# Altium PCB PCB1.PcbDoc
Units mm, origin at the board's own origin, x right, y up, seen from the top; angles counter-clockwise.
Board outline 61 x 61 mm, 2 copper layers (Top Layer, Bottom Layer); 24 components, 33 nets, 119 pads, 18 vias.
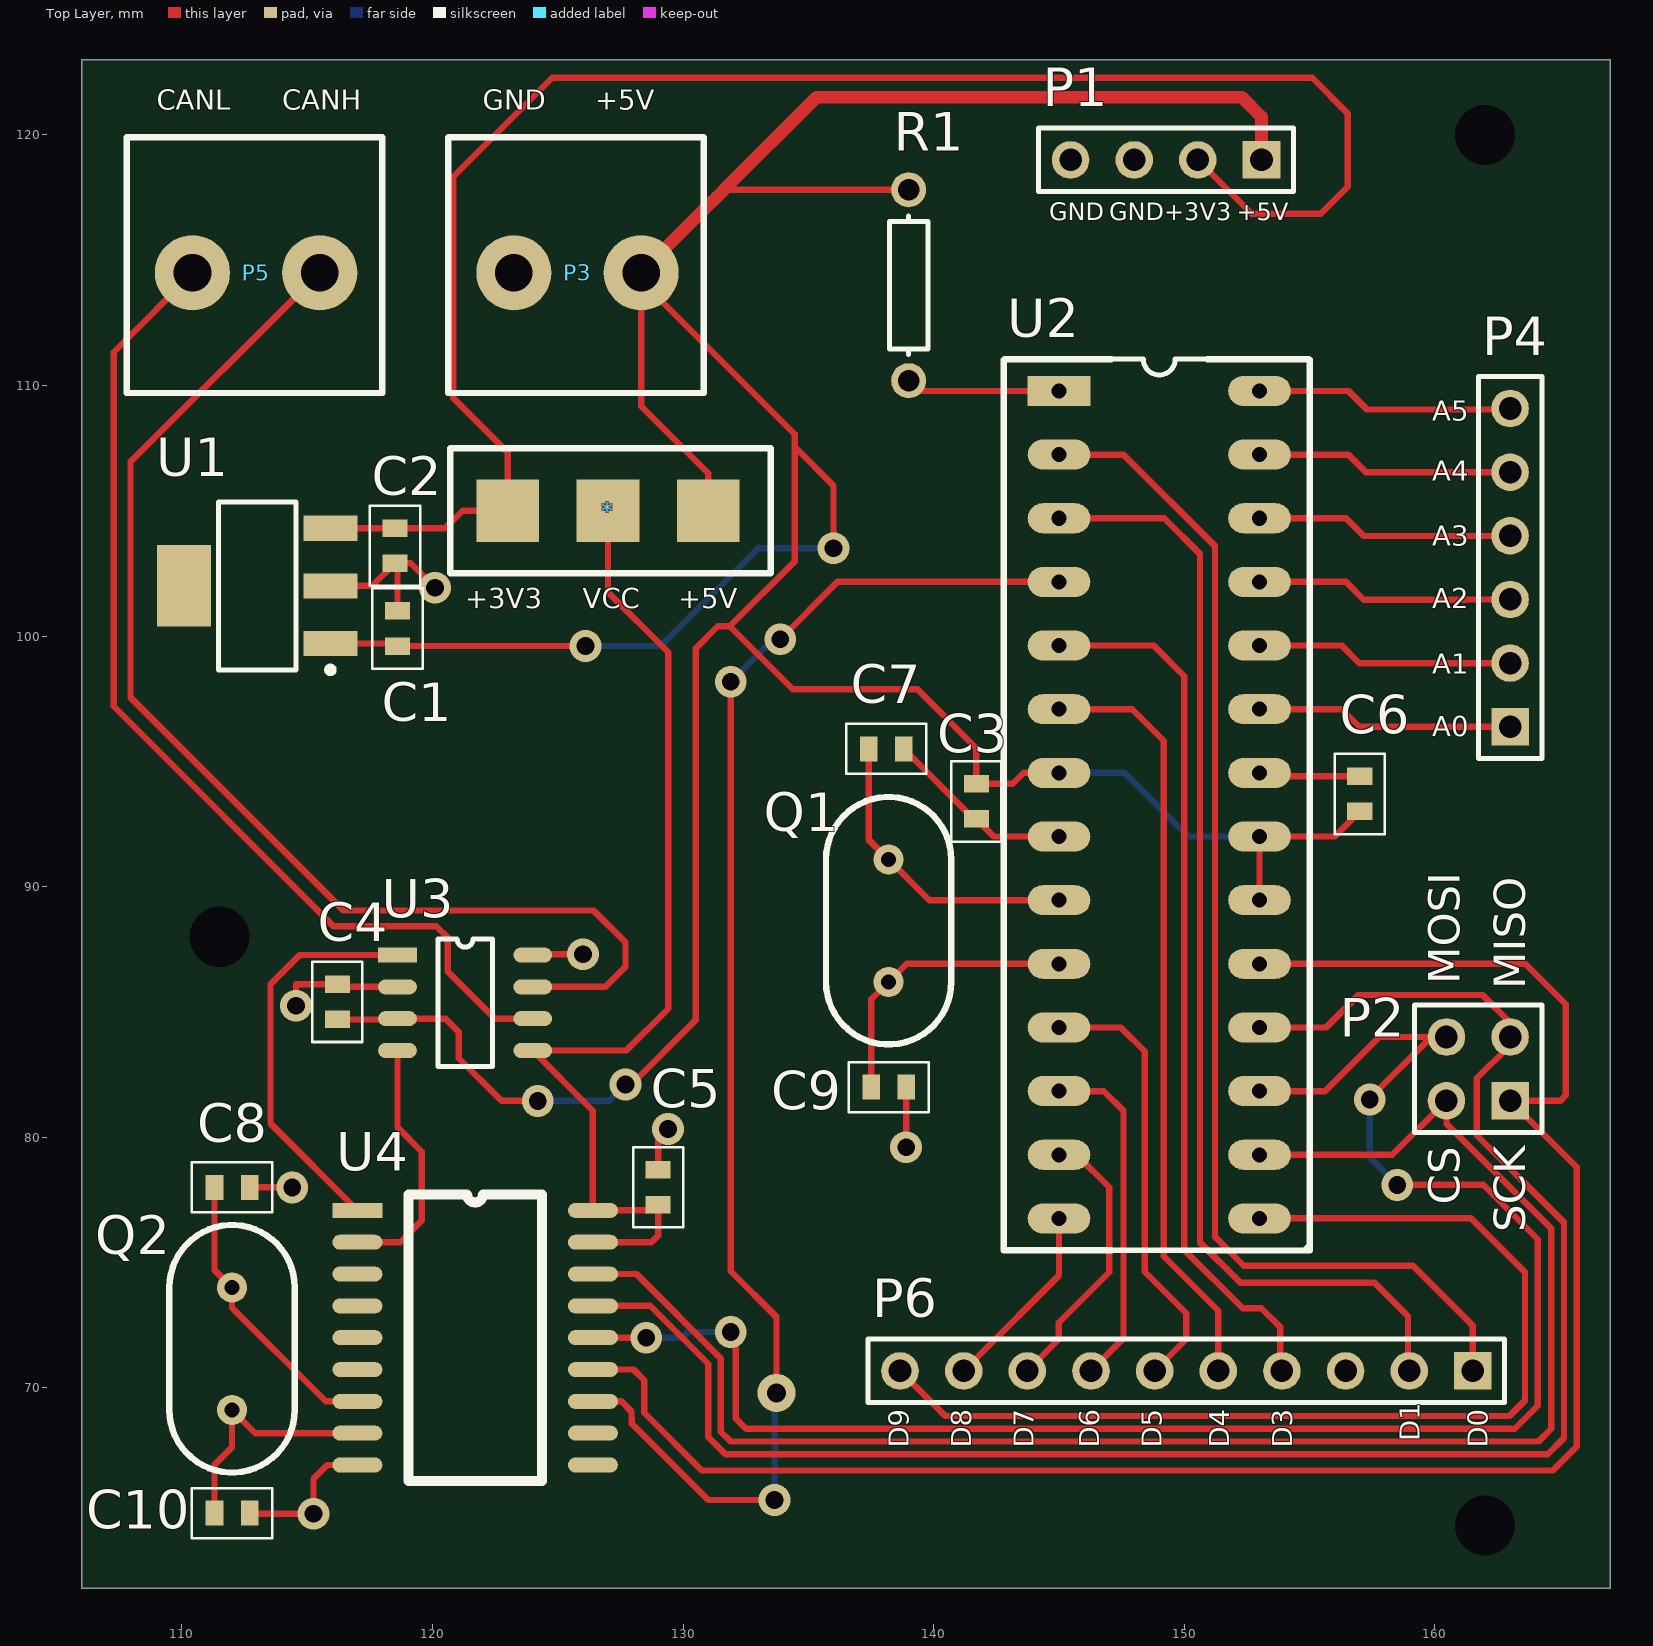
[diagram p0: Top Layer view]
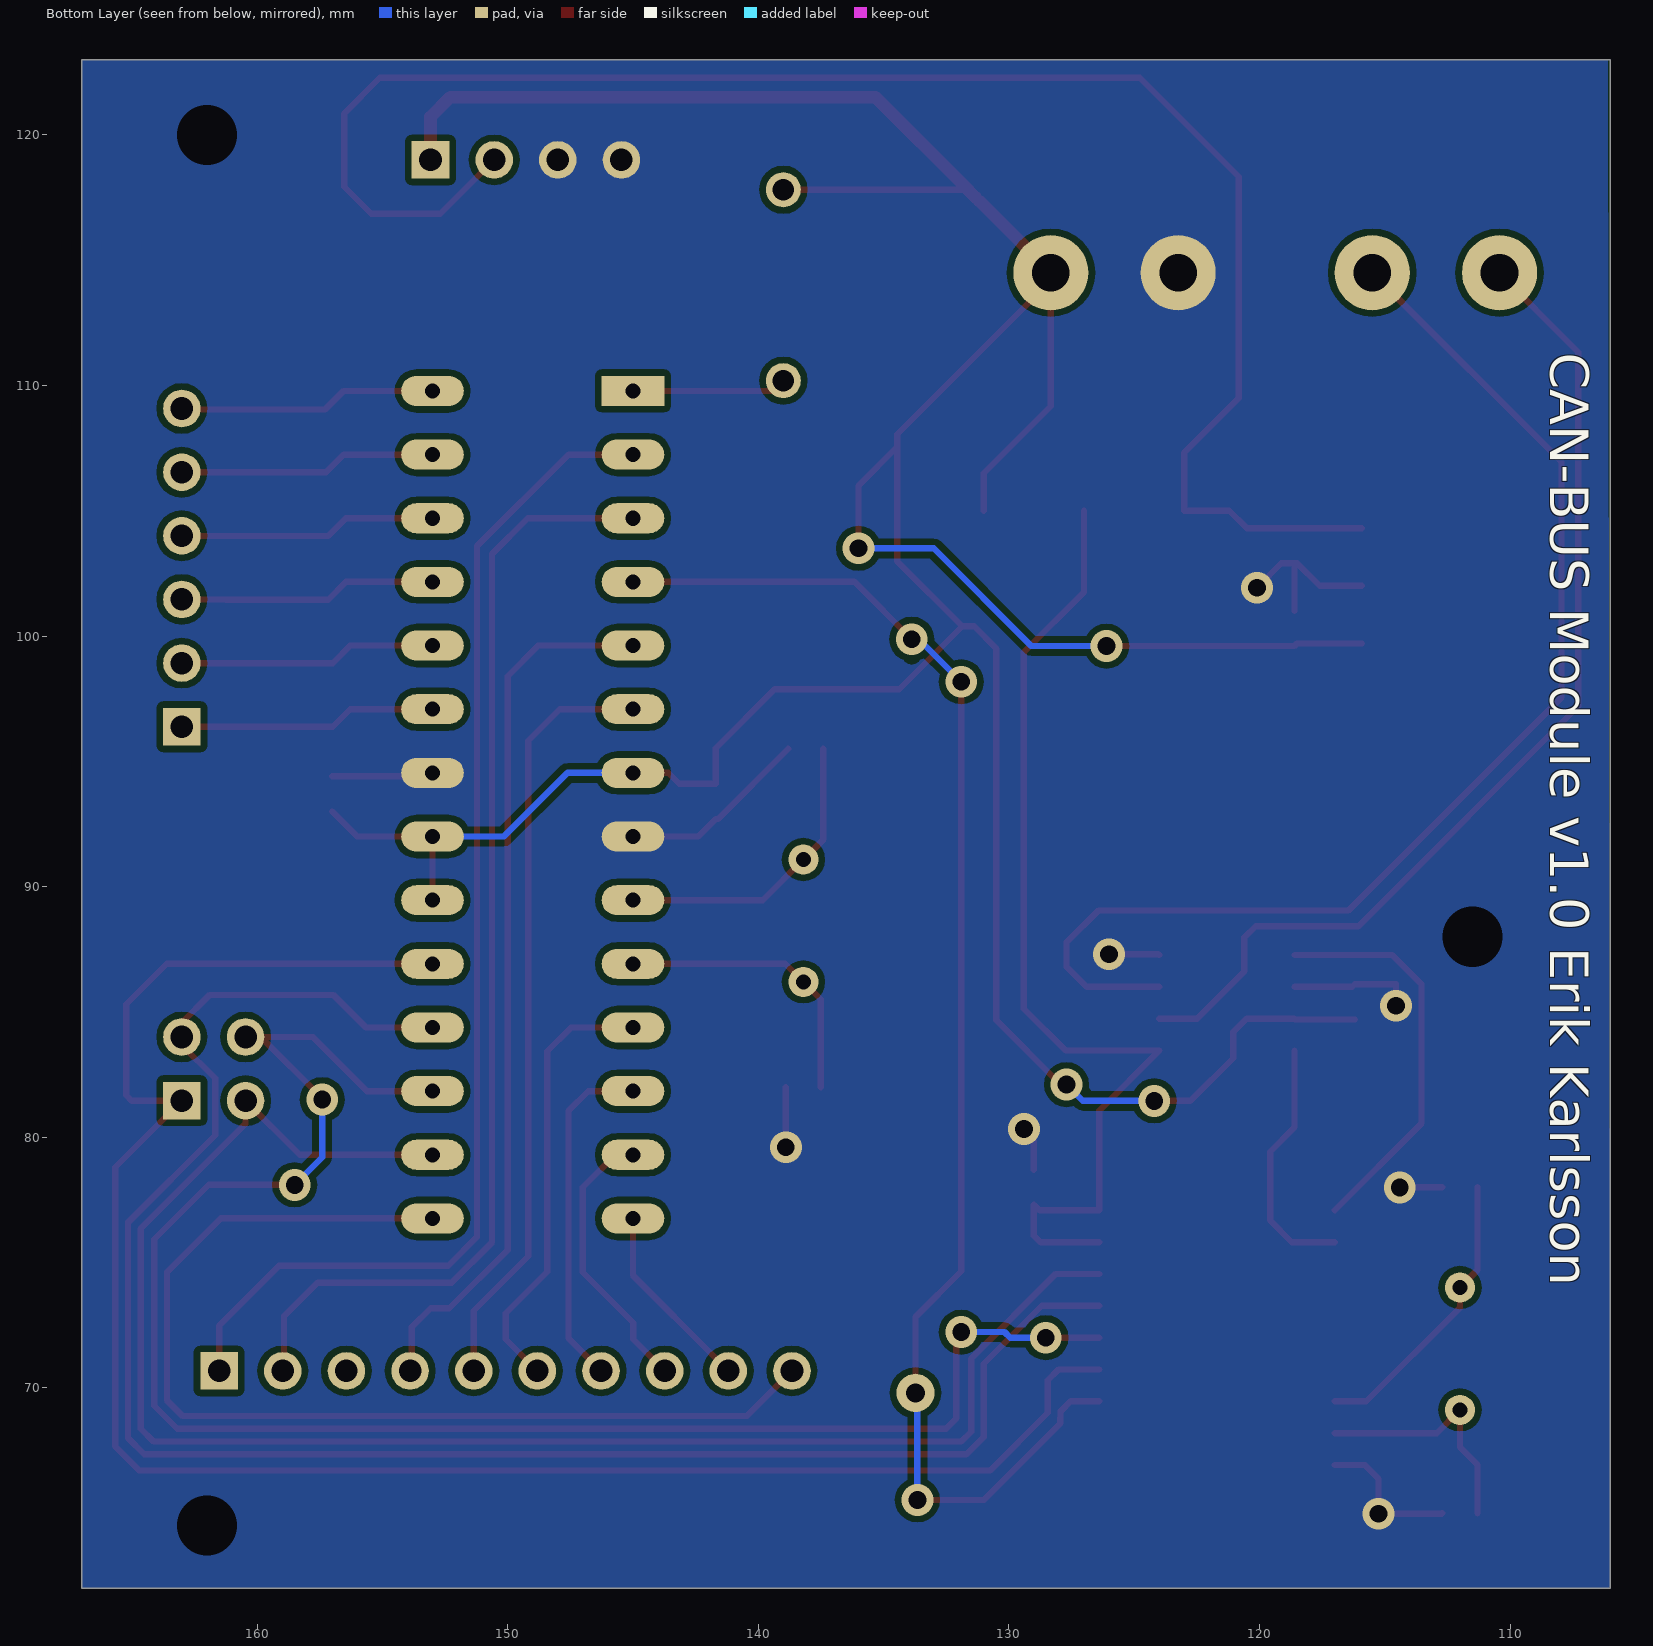
[diagram p1: Bottom Layer view, seen from below]
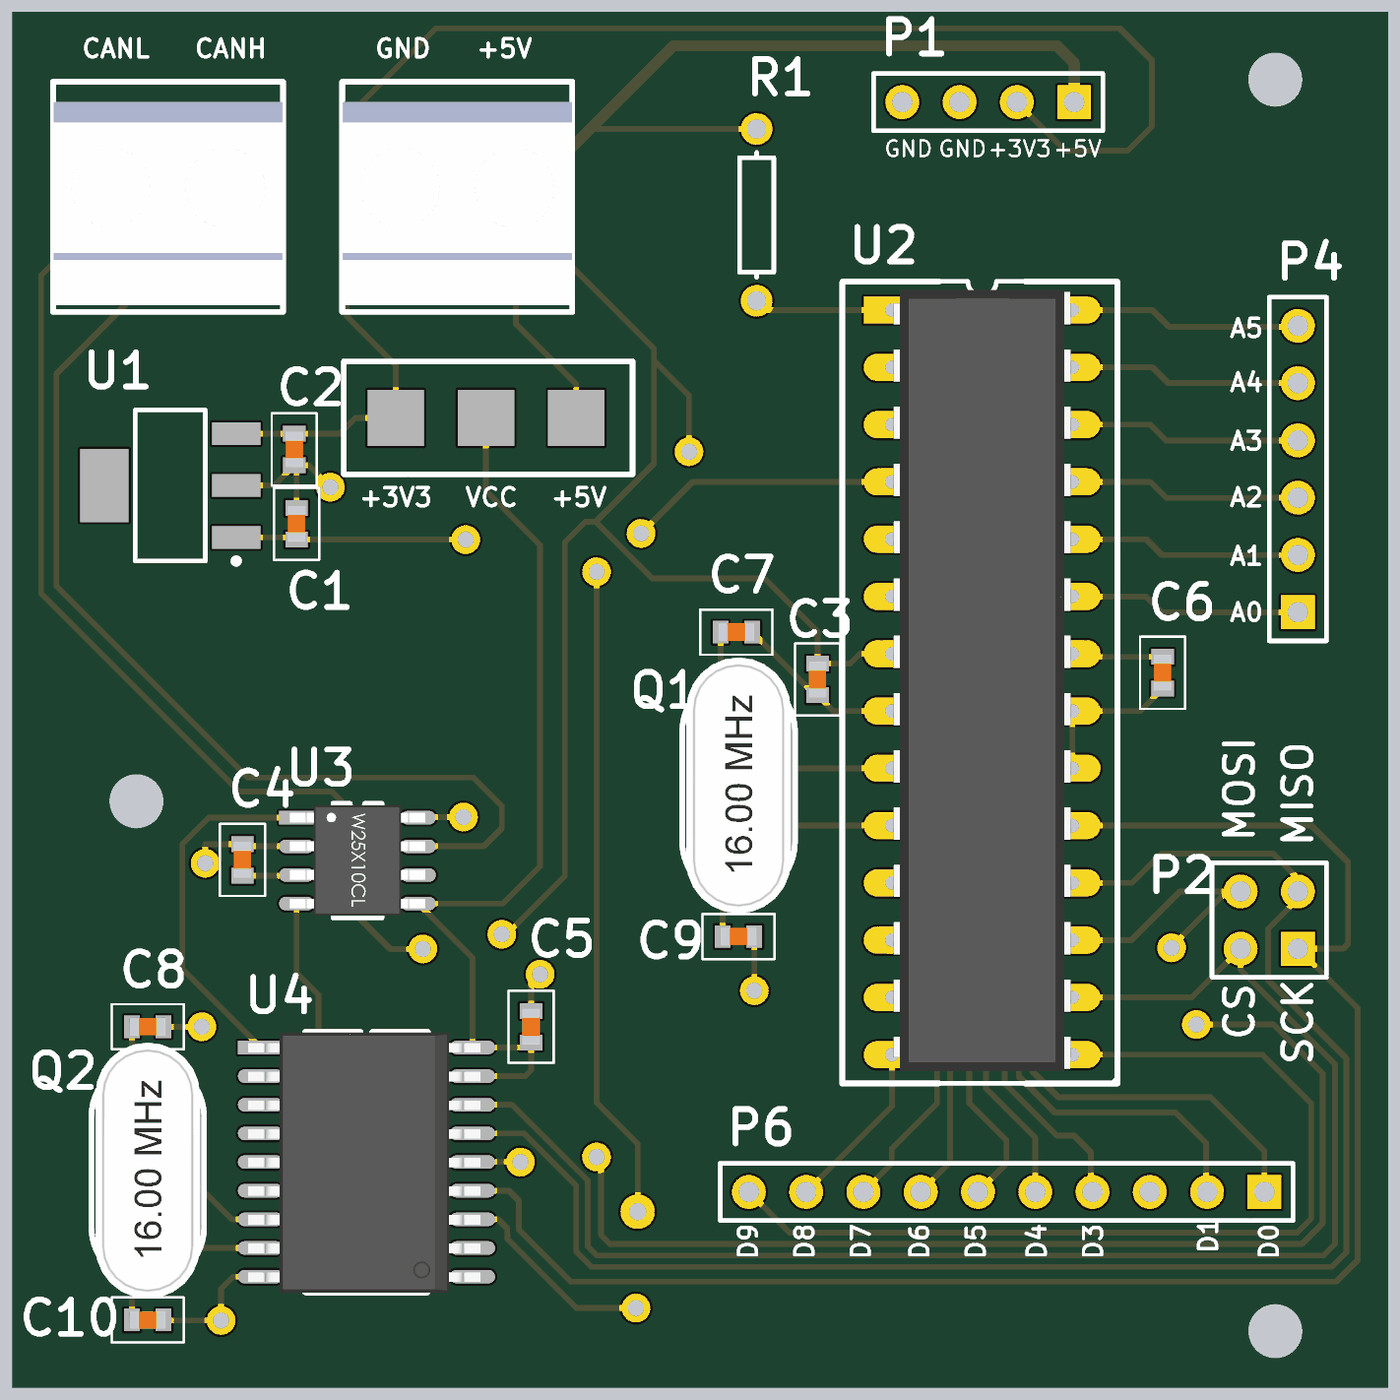
[diagram p2: 3D render of the assembled board from above, using the file's embedded part models]

## Layer stack, top to bottom
Top Solder: solder mask 0.0102, Solder Resist, Dk 3.5
Top Layer: signal copper 0.0356
Dielectric 1: dielectric 0.32, FR-4, Dk 4.8
Bottom Layer: signal copper 0.0356
Bottom Solder: solder mask 0.0102, Solder Resist, Dk 3.5

## Board outline
106,123 106,62 167,62 167,123

## Design rules (kind name [scope] priority, off if disabled: settings)
Clearance [All] p1: gap=0.254 ignorepadtopadclearanceinfootprint=FALSE except(0: Arc-Hole Track-Hole SMDPad-Hole THPad-Hole Via-Hole Fill-Hole Poly-Hole Region-Hole Text-Hole)
PolygonConnect [All] p1: connectstyle=Direct reliefconductorwidth=0.254 reliefentries=4 polygonreliefangle="90 Angle" airgapwidth=0.254
RoomDefinition Sheet1 [InComponentClass('Sheet1')] p1: confinementstyle=ConfineOut formatcopy=TRUE lockcomponents=FALSE outline 212.2,59.2 219.8,59.2 219.8,127.7 212.2,127.7
RoutingVias [All] p1: holewidth=0.711 width=1.27 viastyle="Through Hole" minholewidth=0.711 minwidth=1.27 maxholewidth=0.711 maxwidth=1.27
SolderMaskExpansion [All] p1: expansion=0.102
Width [All] p1: maxlimit=0.5 minlimit=0.254 preferedwidth=0.254 bottomlayer_maxwidth=0.254 minimp=50.000000 maximp=50.000000 favimp=50.000000
30 further rules are at their usual default settings.

## Components (designator, comment, footprint, x,y, rotation, side; value= is the part's Value field where it differs from the comment)
* "solderpads" solderpads 127,105 r180 top
C1 "Cap" "0603 cap" 118.6,100.3 r270 top value=1uF
C2 "Cap" "0603 cap" 118.5,103.6 r90 top value=1uF
C3 "Cap" "0603 cap" 141.7,93.4 r90 top value=0.1uF
C4 "Cap" "0603 cap" 116.2,85.4 r270 top value=0.1uF
C5 "Cap" "0603 cap" 129,78 r270 top value=0.1uF
C6 "Cap" "0603 cap" 157,93.7 r270 top value=0.1uF
C7 "Cap" "0603 cap" 138.1,95.5 r180 top value=22pF
C8 "Cap" "0603 cap" 112,78 r180 top value=22pF
C9 "Cap" "0603 cap" 138.2,82 r180 top value=22pF
C10 "Cap" "0603 cap" 112,65 r180 top value=22pF
P1 "Header 4" HDR1X4 153.08,119 r180 top
P2 "Header 2X2" HDR2X2 163,81.46 r90 top
P3 "MC24366" "2pin screw terminal" 128.325,114.5 r180 top
P4 "Header 6" HDR1X6 163,96.38 r90 top
P5 "MC24366" "2pin screw terminal" 115.5,114.5 r180 top
P6 "Header 10" HDR1X10 161.515,70.675 r180 top
Q1 "16mhz" "DIP HC-49S" 138.2,86.2 r90 top
Q2 "16mhz" "DIP HC-49S" 112,69.12 r90 top
R1 "Res1" AXIAL-0.3 139,114 r90 top value=10K
U1 "TC1262-3.3VDB" SOT230P700X180-4N 113,102 r180 top
U2 "ATMEGA328P-PU" DIP28 145,109.78 r0 top
U3 "MCP2562-E/SN" SOIC8 118.6,87.27 r0 top
U4 "MCP2515-I/SO" SOIC18 117,77.08 r0 top

## Footprints (in the part's own frame and the unit in brackets; to place one, negate y for a bottom-side part, rotate by r counter-clockwise, add the part's x,y. Pads: shape width x height; smd on the part's side, far side on the other; paste and mask are expansions set on the pad)
"2pin screw terminal" [mm]
  round 3 hole 1.5: 1(0,0) 2(5.08,0)
  silkscreen extent -2.5,-5.4 7.7,4.8, body extent -2.48,-4.5 7.68,4.5, height 15.2
"0603 cap" [mm]
  rect 0.7x1 smd: 1(-0.7,0) 2(0.7,0)
  silkscreen extent -1.6,-1 1.6,1, body extent -0.8,-0.4 0.8,0.4, height 0.5
AXIAL-0.3 [mm] "Axial Device, Thru-Hole; 2 Leads; 0.3 in Pin Spacing"
  round 1.4 hole 0.85: 1(-3.81,0) 2(3.81,0)
  silkscreen extent -2.77,-0.76 2.77,0.76
DIP28 [mm]
  rect 2.5x1.2 hole 0.6: 1(0,0)
  oval 2.5x1.2 hole 0.6: 2(0,-2.54) 3(0,-5.08) 4(0,-7.62) 5(0,-10.16) 6(0,-12.7) 7(0,-15.24) 8(0,-17.78) 9(0,-20.32) 10(0,-22.86) 11(0,-25.4) 12(0,-27.94) 13(0,-30.48) 14(0,-33.02) 15(8,-33.02) 16(8,-30.48) 17(8,-27.94) 18(8,-25.4) 19(8,-22.86) 20(8,-20.32) 21(8,-17.78) 22(8,-15.24) 23(8,-12.7) 24(8,-10.16) 25(8,-7.62) 26(8,-5.08) 27(8,-2.54) 28(8,0)
  silkscreen extent -2.2,-34.3 10,1.27, body extent 0.05,-33.75 7.95,0.9, height 5.44
"DIP HC-49S" [mm] "XTAL 16mhz"
  round 1.2 hole 0.6: 1(0,0) 2(4.88,0)
  silkscreen extent -2.5,-2.5 7.38,2.5, body extent -3.17,-2.32 8.18,2.33, height 3.6
HDR1X4 [mm] "Connector; Header; 4 Position"
  rect 1.5x1.5 hole 0.9: 1(0,0)
  round 1.5 hole 0.9: 2(2.54,0) 3(5.08,0) 4(7.62,0)
  silkscreen extent -1.27,-1.27 8.89,1.27
HDR1X6 [mm] "Connector; Header; 6 Position"
  rect 1.5x1.5 hole 0.9: 1(0,0)
  round 1.5 hole 0.9: 2(2.54,0) 3(5.08,0) 4(7.62,0) 5(10.16,0) 6(12.7,0)
  silkscreen extent -1.27,-1.27 13.97,1.27
HDR1X10 [mm] "Connector; Header; 10 Position"
  rect 1.5x1.5 hole 0.9: 1(0,0)
  round 1.5 hole 0.9: 2(2.54,0) 3(5.08,0) 4(7.62,0) 5(10.16,0) 6(12.7,0) 7(15.24,0) 8(17.78,0) 9(20.32,0) 10(22.86,0)
  silkscreen extent -1.27,-1.27 24.13,1.27
HDR2X2 [mm] "Connector; Header; 2x2 Position"
  rect 1.5x1.5 hole 0.9: 1(0,0)
  round 1.5 hole 0.9: 2(0,2.54) 3(2.54,0) 4(2.54,2.54)
  silkscreen extent -1.27,-1.27 3.81,3.81
SOIC8 [mm] "MCP2562-E/SO"
  rect 1.55x0.6 smd: 1(0,0)
  oval 1.55x0.6 smd: 2(0,-1.27) 3(0,-2.54) 4(0,-3.81) 5(5.4,-3.81) 6(5.4,-2.54) 7(5.4,-1.27) 8(5.4,0)
  silkscreen extent 1.61,-4.44 3.79,0.64, body extent -0.3,-4.35 5.7,0.55, height 1.55
SOIC18 [mm] "MCP2515-I/SO"
  rect 2x0.6 smd: 1(0,0)
  oval 2x0.6 smd: 2(0,-1.27) 3(0,-2.54) 4(0,-3.81) 5(0,-5.08) 6(0,-6.35) 7(0,-7.62) 8(0,-8.89) 9(0,-10.16) 10(9.4,-10.16) 11(9.4,-8.89) 12(9.4,-7.62) 13(9.4,-6.35) 14(9.4,-5.08) 15(9.4,-3.81) 16(9.4,-2.54) 17(9.4,-1.27) 18(9.4,0)
  silkscreen extent 2.03,-10.79 7.36,0.64, body extent -0.55,-10.86 9.75,0.67, height 2.65
solderpads [mm]
  rect 2.5x2.5 smd: 1(-4,0) 2(4,0) 3(0,0)
  silkscreen extent -6.5,-2.5 6.3,2.5
SOT230P700X180-4N [mm] "SOT223, 4-Leads, Body 6,50x7,00mm (avg), Pitch 2,30mm, IPC Medium Density"
  rect 2.15x1 smd: 1(-2.925,2.3) 2(-2.925,0) 3(-2.925,-2.3)
  rect 2.15x3.25 smd: 4(2.925,0)
  silkscreen extent -3.05,-3.35 1.55,3.47, body extent -1.85,-3.35 1.85,3.35, height 1.8

## Part data
C1 C2 C3 C4 C5 C6 C7 C8 C9 C10: "Capacitor", Capacitance="100000 pF", Case Style="Ceramic Chip", Manufacturer="Walsin Technologies", Manufacturer Part Number=0603B104K500CT, Operating Temp Range="-55C to 125C", Package / Case=0603, Supplier Part Number 1=2495333, Temp Coeff (Dielectric)=X7R, Tolerance (+ or -)=10%, Voltage=50VDC, ComponentLink1Description=https://www.verical.com/server-webapp/html/getDatasheet?partID=415741, ComponentLink1URL=https://www.verical.com/server-webapp/html/getDatasheet?partID=415741, ComponentLink2Description=http://www.farnell.com/datasheets/1958513.pdf, ComponentLink2URL=http://www.farnell.com/datasheets/1958513.pdf, ComponentLink3Description=http://components.arrow.com/part/dataview/0323_00656447, ComponentLink3URL=http://components.arrow.com/part/dataview/0323_00656447, Construction="SMT Chip", Failure Rate="Not Required", LatestRevisionDate=17-Jul-2002, LatestRevisionNote="Re-released for DXP Platform.", Mounting Style="Surface Mount", PackageDescription="Radial Cap, Thru-Hole; 2 Leads; 0.3 in Pin Spacing", PackageReference=RAD-0.3, Packaging="Tape and Reel", Pricing 1="4000=0.0042, 20000=0.0028, 40000=0.0022 (EUR)", Product Depth (mm)="0.8 mm", Product Diameter (mm)="Not Required mm", Product Height (mm)="0.8 mm", Product Length (mm)="1.6 mm", Published=8-Jun-2000, Publisher="Altium Limited", Rad Hardened=No, Stock 1=3233000, Supplier 1=Farnell, Wire Form="Not Required"
P1: "Header, 4-Pin", LatestRevisionDate=17-Jul-2002, LatestRevisionNote="Re-released for DXP Platform.", Publisher="Altium Limited"
P2: "Header, 2-Pin, Dual row", LatestRevisionDate=17-Jul-2002, LatestRevisionNote="Re-released for DXP Platform.", Publisher="Altium Limited"
P3 P5: "TERMINAL BLOCK EUROSTYLE, 2POS, 26-12AWG", Manufacturer=Multicomp, Rated Current=16A, Rated Voltage=300V, Supplier Part Number 1=2396251, Block Orientation="Through Hole Right Angle", ComponentLink1Description=https://datasheet.ciiva.com/23597/ta-987-23597041.pdf, ComponentLink1URL=https://datasheet.ciiva.com/23597/ta-987-23597041.pdf, ComponentLink2Description=https://datasheet.ciiva.com/5717/ta-987-5717047.pdf, ComponentLink2URL=https://datasheet.ciiva.com/5717/ta-987-5717047.pdf, Manufacturer Part Number=MC24366, No. of Positions=2Ways, Pitch Spacing=5.08mm, Pricing 1="1=0.319, 5=0.288, 25=0.257, 50=0.226, 100=0.195, 250=0.165 (EUR)", Series=MB310-508M, Stock 1=9112, Supplier 1=Farnell, SVHC="No SVHC (15-Jun-2015)", Wire Connection Method=Screw, Wire Size AWG Max=12AWG, Wire Size AWG Min=26AWG
P4: "Header, 6-Pin", LatestRevisionDate=17-Jul-2002, LatestRevisionNote="Re-released for DXP Platform.", Publisher="Altium Limited"
P6: "Header, 10-Pin", LatestRevisionDate=17-Jul-2002, LatestRevisionNote="Re-released for DXP Platform.", Publisher="Altium Limited"
Q1 Q2: library part 9B-16.000MAAJ-B, "16MHz ±30ppm Crystal 18pF 30 Ohm -20°C ~ 70°C  Through Hole HC49/US", ESR (Equivalent Series Resistance)="30 Ohm", Frequency=16MHz, Frequency Stability=±30ppm, Load Capacitance=18pF, Manufacturer=TXC, Operating Mode=Fundamental, Operating Temperature="-20°C ~ 70°C", Package / Case=HC49/US, Standard Package=1,000, Supplier Part Number 1=1842216, Catalog Drawings="9B Series Side 1 /  / 9B Series Side 2 /  / 9B Series Bottom /  / 9B Series Top", Category="Crystals and Oscillators", ComponentLink1Description=https://datasheet.ciiva.com/855/9b-855214.pdf, ComponentLink1URL=https://datasheet.ciiva.com/855/9b-855214.pdf, ComponentLink2Description=https://datasheet.ciiva.com/1356/number-crystal-basic-1356749.pdf, ComponentLink2URL=https://datasheet.ciiva.com/1356/number-crystal-basic-1356749.pdf, ComponentLink3Description=https://datasheet.ciiva.com/26833/getdatasheetpartid-743113-26833255.pdf, ComponentLink3URL=https://datasheet.ciiva.com/26833/getdatasheetpartid-743113-26833255.pdf, Dynamic Catalog="9B Series", Family=Crystals, Frequency Tolerance=±30ppm, Height="0.145\" (3.68mm)", Manufacturer Part Number=9B-16.000MAAJ-B, Mounting Type="Through Hole", Other Names=887-1019, Packaging=Bulk, Pricing 1="1=0.436, 50=0.303, 100=0.252, 250=0.248, 500=0.235, 1000=0.186, 5000=0.179, 10000=0.175 (EUR)", Series=9B, Size / Dimension="0.453\" L x 0.197\" W (11.50mm x 5.00mm)", Stock 1=9009, Supplier 1=Farnell, Type="MHz Crystal"
R1: "Resistor", LatestRevisionDate=17-Jul-2002, LatestRevisionNote="Re-released for DXP Platform.", PackageDescription="Axial Device, Thru-Hole; 2 Leads; 0.3 in Pin Spacing", PackageReference=AXIAL-0.3, Published=8-Jun-2000, Publisher="Altium Limited"
U2: "ATMEL         ATMEGA328P-PU            8 Bit Microcontroller, Low Power High Performance, ATmega, 20 MHz, 32 KB, 2 KB, 28 Pins, DIP", Manuf. Code=ATM, Manufacturer=Atmel, Max. operating temperature="+85 °C", Operating temperature (min.)="-40 °C", Supplier Part Number 1=1715487, Supply voltage (max.)="5.5 V", Supply voltage (min.)="1.8 V", Casing="PDIP 28", Clock speed="20 MHz", ComponentLink1Description=https://datasheet.ciiva.com/19457/2139111-19457070.pdf, ComponentLink1URL=https://datasheet.ciiva.com/19457/2139111-19457070.pdf, ComponentLink2Description=https://datasheet.ciiva.com/20168/73-4283-20168380.pdf, ComponentLink2URL=https://datasheet.ciiva.com/20168/73-4283-20168380.pdf, ComponentLink3Description=https://datasheet.ciiva.com/1157/1684409-1157696.pdf, ComponentLink3URL=https://datasheet.ciiva.com/1157/1684409-1157696.pdf, ComponentLink4Description=https://datasheet.ciiva.com/29119/155197-da-01-en-microcontr-atmega328p-pu-8bit-pdip-28-29119593.pdf, ComponentLink4URL=https://datasheet.ciiva.com/29119/155197-da-01-en-microcontr-atmega328p-pu-8bit-pdip-28-29119593.pdf, ComponentLink5Description=https://datasheet.ciiva.com/26818/atmega328p-pu-26818578.pdf, ComponentLink5URL=https://datasheet.ciiva.com/26818/atmega328p-pu-26818578.pdf, ComponentLink6Description=https://datasheet.ciiva.com/15213/getdatasheetpartid-318533-15213133.pdf, ComponentLink6URL=https://datasheet.ciiva.com/15213/getdatasheetpartid-318533-15213133.pdf, Connectivity="I²C, SPI, UART/USART", Core size=8-Bit, Data converter (embedded microcontroller)="A/D 6x10b", EEPROM size="1 K x 8", I/O number=23, Manufacturer Part Number=ATMEGA328P-PU, Oscillator type=Internal, Peripherals="Brown-out Detect/Reset, POR, PWM, WDT", Pricing 1="1=3.33, 10=2.98, 25=2.68, 50=2.48, 100=2.35, 250=1.98, 600=1.67, 2000=1.64 (EUR)", Processor core=AVR, Program memory size="32 KB (16 K x 16)", Program memory type=FLASH, RAM size="2 K x 8", Series (embedded microcontroller)="AVR® ATmega", Stock 1=2066, Supplier 1=Farnell, Type=ATMEGA328P-PU
U3: "MICROCHIP         MCP2562-E/SN            CAN Bus, Transceiver, CAN, LIN, 1, 1, 4.5 V, 5.5 V, SOIC", Manufacturer="Microchip Technology", Maximum Operating Temperature="+ 125 C", Minimum Operating Temperature="- 40 C", Operating Supply Voltage="1.8 V to 5.5 V", Operating Temperature Range="- 40 C to + 125 C", Package / Case=SOIC-8, Supplier Part Number 1=2362839, Supply Current="70 mA", Supply Voltage - Max="5.5 V", Supply Voltage - Min="1.8 V", Brand="Microchip Technology", ComponentLink1Description=https://datasheet.ciiva.com/26922/getdatasheetpartid-776214-26922473.pdf, ComponentLink1URL=https://datasheet.ciiva.com/26922/getdatasheetpartid-776214-26922473.pdf, ComponentLink2Description=https://datasheet.ciiva.com/24192/filehandler-aspxddocname-en561044-24192158.pdf, ComponentLink2URL=https://datasheet.ciiva.com/24192/filehandler-aspxddocname-en561044-24192158.pdf, ComponentLink3Description=https://datasheet.ciiva.com/39123/21125167b-39123503.pdf, ComponentLink3URL=https://datasheet.ciiva.com/39123/21125167b-39123503.pdf, ComponentLink4Description=https://datasheet.ciiva.com/18624/25167b-18624808.pdf, ComponentLink4URL=https://datasheet.ciiva.com/18624/25167b-18624808.pdf, ComponentLink5Description=https://datasheet.ciiva.com/29898/25167b-29898006.pdf, ComponentLink5URL=https://datasheet.ciiva.com/29898/25167b-29898006.pdf, ComponentLink6Description=https://datasheet.ciiva.com/22747/1755821-22747911.pdf, ComponentLink6URL=https://datasheet.ciiva.com/22747/1755821-22747911.pdf, ComponentLink7Description=https://datasheet.ciiva.com/48512/mcp2562-eng-tds-48512071.pdf, ComponentLink7URL=https://datasheet.ciiva.com/48512/mcp2562-eng-tds-48512071.pdf, Data Rate="1 Mbps", Factory Pack Quantity=100, Manufacturer Part Number=MCP2562-E/SN, Mounting Style=SMD/SMT, Packaging=Tube, Pricing 1="1=1.12, 10=0.838, 25=0.714, 50=0.674, 100=0.638 (EUR)", Product Category="CAN Interface IC", Propagation Delay Time="125 ns", Propagation Delay Time ns="125 ns", RoHS=Details, Stock 1=10814, Supplier 1=Farnell, Type="CAN Transceiver"
U4: "MICROCHIP         MCP2515-I/SO             CAN Bus, Controller, SPI, 3, 2, 2.7 V, 5.5 V, SOIC", Interface Case Style=SOIC, Manufacturer="Microchip Technology", Operating Temperature Max=85°C, Operating Temperature Min=-40°C, Supplier Part Number 1=1292239, Supply Voltage Max=5.5V, Supply Voltage Min=2.7V, Automotive Qualification Standard=-, ComponentLink1Description=https://datasheet.ciiva.com/14152/ea644222-e-14152533.pdf, ComponentLink1URL=https://datasheet.ciiva.com/14152/ea644222-e-14152533.pdf, ComponentLink2Description=https://datasheet.ciiva.com/18405/70045398-18405546.pdf, ComponentLink2URL=https://datasheet.ciiva.com/18405/70045398-18405546.pdf, ComponentLink3Description=https://datasheet.ciiva.com/1495/1669372-1495083.pdf, ComponentLink3URL=https://datasheet.ciiva.com/1495/1669372-1495083.pdf, ComponentLink4Description=https://datasheet.ciiva.com/1695/21801g-1695405.pdf, ComponentLink4URL=https://datasheet.ciiva.com/1695/21801g-1695405.pdf, ComponentLink5Description=https://datasheet.ciiva.com/15150/getdatasheetpartid-446809-15150054.pdf, ComponentLink5URL=https://datasheet.ciiva.com/15150/getdatasheetpartid-446809-15150054.pdf, ComponentLink6Description=https://datasheet.ciiva.com/16205/filehandler-aspxddocname-en011733-16205222.pdf, ComponentLink6URL=https://datasheet.ciiva.com/16205/filehandler-aspxddocname-en011733-16205222.pdf, ComponentLink7Description=https://datasheet.ciiva.com/29305/651448-da-01-en-ic-can-cont-mcp2515-i-so-soic-18-mcp-29305158.pdf, ComponentLink7URL=https://datasheet.ciiva.com/29305/651448-da-01-en-ic-can-cont-mcp2515-i-so-soic-18-mcp-29305158.pdf, IC Interface Type=SPI, Manufacturer Part Number=MCP2515-I/SO, No. of Pins=18Pins, No. of RX Buffers=2, No. of TX Buffers=3, Packaging=Each, Pricing 1="1=1.83, 10=1.55, 25=1.46, 50=1.36, 100=1.29 (EUR)", Product Range=-, Stock 1=8767, Supplier 1=Farnell

## Free pads (board coordinates)
  round 1.524 hole 0.762: 2(133.725,69.8)
  round 1.524 hole 2.4 unplated: 3(111.5,88) 3(162,120) 4(162,64.5)

## Via types
v1: diameter 1.27, hole 0.711, Top Layer to Bottom Layer, 18 vias

## Nets (pads, with @x,y where several pads share a name; then routed paths per layer and width w, separated by ;. In a path a pad name is that pad's centre, name@x,y a point inside that pad or via, vN(x,y) a via of type N, cw(c..) or ccw(c..) an arc to the next point about the centre after c; other vN are vias at no path point)
+3V3: *.2 C2.2 P1.2 U1.3 | length 69.8
  Top Layer w0.254: U1.3 C2.2 120.5,104.3 121.2,105 *.2 123,107.325 120.825,109.5 120.825,118.325 124.775,122.275 155.1,122.275 156.525,120.85 156.525,117.925 155.45,116.85 152.69,116.85 P1.2
+5: *.1 C1.2 C3.2 C4.2 C6.2 P1.1 P3.1 R1.2 U1.1 U2.7 U2.20 U2.21 U3.3 | length 158.9
  Top Layer w0.254: U1.1 118.5,99.7 C1.2 v1(126.1,99.6) ; C4.2 118.57,84.7 U3.3 120.52,84.73 121.05,84.2 121.05,83.15 122.75,81.45 v1(124.2,81.45) ; v1(127.7,82.1) 127.925,82.1 130.5,84.675 130.5,99.5 131.388,100.388 131.862,100.388 ; P3.1 P3.1@128.325,114.175 ; *.1 131,106.5 128.325,109.175 P3.1@128.325,114.175 ; 131.2,117.375 131.325,117.5 ; 131.625,117.8 131.635,117.81 R1.2 R1.2@138.69,117.5 ; v1(136,103.5) 136,106 134.45,107.55 ; U2.7 143.59,94.54 143.15,94.1 C3.2 141.7,95.525 139.35,97.875 134.375,97.875 131.862,100.388 ; U2.20 U2.21 156,92 C6.2 ; P3.1@128.325,114.175 134.45,108.05 134.45,107.55 ; 131.862,100.388 134.45,102.975 134.45,107.55
  Top Layer w0.5: P3.1 131.2,117.375 ; 131.325,117.5 131.625,117.8 ; 131.635,117.81 135.325,121.5 152.3,121.5 153.08,120.72 P1.1
  Bottom Layer w0.254: v1(124.2,81.45) 127.05,81.45 v1(127.7,82.1) ; v1(126.1,99.6) 129.1,99.6 133,103.5 v1(136,103.5) ; U2.7 147.61,94.54 150.15,92 U2.21
GND: C1.1 C2.1 C3.1 C4.1 C5.1 C6.1 C7.1 C8.1 C9.1 C10.1 P1.3 P1.4 P3.2 pad.3 pad.4 U1.2 U2.8 U2.22 U3.2 U3.8 U4.9 | length 38.6
  Top Layer w0.254: C10.1 112.725,64.975 v1(115.25,64.975) 115.25,66.375 115.795,66.92 U4.9 ; C8.1 v1(114.4,78) ; v1(114.55,85.25) 114.55,86.1 C4.1 116.3,86 U3.2 ; U1.2 117.6,102 C2.1 ; C1.1 118.6,102.8 C2.1 ; v1(120.1,101.925) 119.125,102.9 C2.1 ; U3.8 124.03,87.3 v1(126,87.3) ; C5.1 129,79.925 v1(129.4,80.325) ; C7.1 141.6,92.7 C3.1 142.4,92 U2.8 145.45,91.55 U2.8@145.875,91.975 ; v1(138.9,79.6) C9.1 ; U2.22 153.14,94.4 C6.1
NetC7_2: C7.2 Q1.2 U2.9 | length 12.2
  Top Layer w0.254: C7.2 137.4,91.88 Q1.2 139.82,89.46 U2.9
NetC8_2: C8.2 Q2.2 U4.7 | length 11.6
  Top Layer w0.254: C8.2 111.3,74.7 Q2.2 112,73.2 115.74,69.46 U4.7
NetC9_2: C9.2 Q1.1 U2.10 | length 11.6
  Top Layer w0.254: C9.2 137.5,85.5 Q1.1 138.92,86.92 U2.10
NetC10_2: C10.2 Q2.1 U4.8 | length 9.8
  Top Layer w0.254: C10.2 111.3,66.925 112,67.625 Q2.1 112.93,68.19 U4.8
NetP2_1: P2.1 U2.19 U4.13 | length 75.8
  Top Layer w0.254: U4.13 128.02,70.73 128.45,70.3 128.45,69 130.75,66.7 164.7,66.7 165.658,67.658 165.658,78.802 P2.1 165.01,81.46 165.225,81.675 165.225,85.3 163.605,86.92 U2.19
NetP2_2: P2.2 U2.16 U4.16 | length 66.1
  Top Layer w0.254: U4.16 128.14,74.54 131.508,71.172 131.508,68.25 131.9,67.858 164.133,67.858 164.642,68.367 164.642,76.358 160.46,80.54 P2.2 158.3,79.3 U2.16
NetP2_3: P2.3 U2.18 U4.15 | length 72.7
  Top Layer w0.254: U4.15 128.692,73.27 131,70.962 131,68.04 131.69,67.35 164.5,67.35 165.15,68 165.15,76.6 161.675,80.075 161.675,82.35 163,83.675 P2.3 163,84.575 161.9,85.675 156.95,85.675 155.655,84.38 U2.18
NetP2_4: P2.4 U2.17 U4.14 | length 70.5
  Top Layer w0.254: U4.14 v1(128.525,72) ; v1(131.9,72.225) 132.1,72.025 132.1,68.776 132.51,68.366 163.184,68.366 164.1,69.282 164.1,75.925 161.925,78.1 v1(158.5,78.1) ; U2.17 155.615,81.84 157.775,84 P2.4@159.85,84 ; v1(157.4,81.5) 157.4,81.55 P2.4@159.85,84 ; P2.4 P2.4@159.85,84
  Bottom Layer w0.254: v1(128.525,72) 129.95,72 130.175,72.225 v1(131.9,72.225) ; v1(157.4,81.5) 157.4,79.2 v1(158.5,78.1)
NetP4_1: P4.1 U2.23 | length 10.3
  Top Layer w0.254: U2.23 156.275,97.08 156.98,96.375 160.6,96.375 160.605,96.38 P4.1
NetP4_2: P4.2 U2.24 | length 10.3
  Top Layer w0.254: U2.24 156.275,99.62 156.98,98.915 162.995,98.915 P4.2
NetP4_3: P4.3 U2.25 | length 10.3
  Top Layer w0.254: U2.25 156.45,102.16 157.16,101.45 161.225,101.45 161.235,101.46 P4.3
NetP4_4: P4.4 U2.26 | length 10.3
  Top Layer w0.254: U2.26 156.45,104.7 157.16,103.99 162.99,103.99 P4.4
NetP4_5: P4.5 U2.27 | length 10.3
  Top Layer w0.254: U2.27 156.55,107.24 157.25,106.54 P4.5
NetP4_6: P4.6 U2.28 | length 10.3
  Top Layer w0.254: U2.28 156.55,109.78 157.29,109.04 162.96,109.04 P4.6
NetP5_1: P5.1 U3.7 | length 49.6
  Top Layer w0.254: P5.1@115.98,113.48 115.23,114.23 107.95,106.95 107.95,97.55 116.45,89.05 126.425,89.05 127.7,87.775 127.7,86.8 126.9,86 U3.7
NetP5_2: P5.2 U3.6 | length 41.6
  Top Layer w0.254: P5.2@110.67,114.725 107.275,111.33 107.275,97.2 116.05,88.425 120.15,88.425 120.6,87.975 120.6,86.625 122.495,84.73 U3.6
NetP6_1: P6.1 U2.2 | length 48.9
  Top Layer w0.254: U2.2 147.575,107.24 151.225,103.59 151.225,76.025 152.375,74.875 159.125,74.875 161.515,72.485 P6.1
NetP6_2: P6.2 U2.3 | length 45.4
  Top Layer w0.254: U2.3 149.2,104.7 150.625,103.275 150.625,75.8 152.225,74.2 157.575,74.2 158.925,72.85 158.925,70.725 P6.2
NetP6_4: P6.4 U2.5 | length 34.9
  Top Layer w0.254: U2.5 148.78,99.62 150,98.4 150,75.5 152.325,73.175 153.075,73.175 153.825,72.425 P6.4@153.825,71.075
NetP6_5: P6.5 U2.6 | length 30.7
  Top Layer w0.254: U2.6 147.92,97.08 149.175,95.825 149.175,75.25 151.355,73.07 P6.5@151.355,70.7
NetP6_6: P6.6 U2.11 | length 17.8
  Top Layer w0.254: U2.11 147.47,84.38 148.425,83.425 148.425,74.625 150.075,72.975 150.075,71.935 P6.6
NetP6_7: P6.7 U2.12 | length 13.8
  Top Layer w0.254: U2.12 146.785,81.84 147.575,81.05 147.575,71.975 P6.7
NetP6_8: P6.8 U2.13 | length 11.2
  Top Layer w0.254: P6.8 144.995,71.935 144.995,72.602 147,74.607 147,78 145.7,79.3 U2.13
NetP6_9: P6.9 U2.14 | length 6.9
  Top Layer w0.254: P6.9@141.703,71.182 145,74.48 U2.14
NetP6_10: P6.10 U2.15 | length 42.5
  Top Layer w0.254: P6.10 140.455,68.875 162.975,68.875 163.592,69.492 163.592,74.608 161.44,76.76 U2.15
NetR1_1: R1.1 U2.1 | length 6.2
  Top Layer w0.254: R1.1 139.41,109.78 U2.1
NetU2_4: pad.2 U2.4 U4.12 | length 57.3
  Top Layer w0.254: U4.12 127.54,69.46 127.942,69.058 127.942,68.79 127.95,68.782 127.95,68.575 131,65.525 v1(133.65,65.525) ; v1(131.9,98.175) 131.9,74.65 133.725,72.825 pad.2 ; v1(133.875,99.875) 136.16,102.16 U2.4
  Bottom Layer w0.254: v1(131.9,98.175) 133.6,99.875 v1(133.875,99.875) ; v1(133.65,65.525) 133.65,69.725 pad.2
NetU3_1: U3.1 U4.1 | length 16
  Top Layer w0.254: U4.1 113.534,80.546 113.534,86.109 114.695,87.27 U3.1
NetU3_4: U3.4 U4.2 | length 10.1
  Top Layer w0.254: U4.2 118.71,75.81 119.575,76.675 119.575,79.425 118.6,80.4 U3.4
VCC: *.3 C5.2 U3.5 U4.17 U4.18 | length 41
  Top Layer w0.254: U4.17 128.735,75.81 129,76.075 C5.2 128.78,77.08 U4.18 126.4,81.06 U3.5 127.735,83.46 129.4,85.125 129.4,99.35 127,101.75 *.3
pads on no net: P6.3 U1.4 U4.3 U4.4 U4.5 U4.6 U4.10 U4.11

## Polygon pours and split planes (outlines as drawn)
GND on Bottom Layer "Bottom Layer-No Net" (solid, pour order 0): 106.102,123 167,123 167,62 105.998,62

## Silkscreen, mask and mechanical layers (free items; w line width, h text height)
Top Overlay:
  text "CANL" at 109,121 h0.8
  text "CANH" at 114,121 h0.8
  text "GND" at 122,121 h0.8
  text "+5V" at 126.5,121 h0.8
  text "GND" at 144.6,116.6 h0.7
  text "GND" at 147,116.6 h0.7
  text "+3V3" at 149.2,116.6 h0.7
  text "+5V" at 152.1,116.6 h0.7
  text "A5" at 159.9,108.6 h0.8
  text "A4" at 159.9,106.2 h0.8
  text "A3" at 159.9,103.6 h0.8
  text "+3V3" at 121.3,101.1 h0.8
  text "VCC" at 126,101.1 h0.8
  text "+5V" at 129.8,101.1 h0.8
  text "A2" at 159.9,101.1 h0.8
  text "A1" at 159.9,98.5 h0.8
  text "A0" at 159.9,96 h0.8
  text "D1" at 159.4,67.867 h0.8 r90
  text "D9" at 139,67.6 h0.8 r90
  text "D8" at 141.5,67.6 h0.8 r90
  text "D7" at 144,67.6 h0.8 r90
  text "D6" at 146.6,67.6 h0.8 r90
  text "D5" at 149.1,67.6 h0.8 r90
  text "D4" at 151.8,67.6 h0.8 r90
  text "D3" at 154.3,67.6 h0.8 r90
  text "D0" at 162.1,67.6 h0.8 r90
Bottom Overlay:
  text "CAN-BUS Module v1.0 Erik Karlsson" at 108.4,111.3 h1.52 r90
Border outline:
  the board outline again, w0.254

## Text inside footprints (layer, text, board x,y; h text height)
P2: Top Overlay "SCK" at 163.6,76.2 h1.27 r90; Top Overlay "CS" at 161,77.3 h1.27 r90; Top Overlay "MOSI" at 161,86.112 h1.27 r90; Top Overlay "MISO" at 163.6,85.9 h1.27 r90